# Altium PCB HS0038_BOARD.PcbDoc
Units mm, origin at the board's own origin, x right, y up, seen from the top; angles counter-clockwise.
Board outline 85 x 85 mm, 2 copper layers (Top Layer, Bottom Layer); 70 components, 51 nets, 283 pads, 29 vias.
Unrouted connection lines stored in the file: 40.
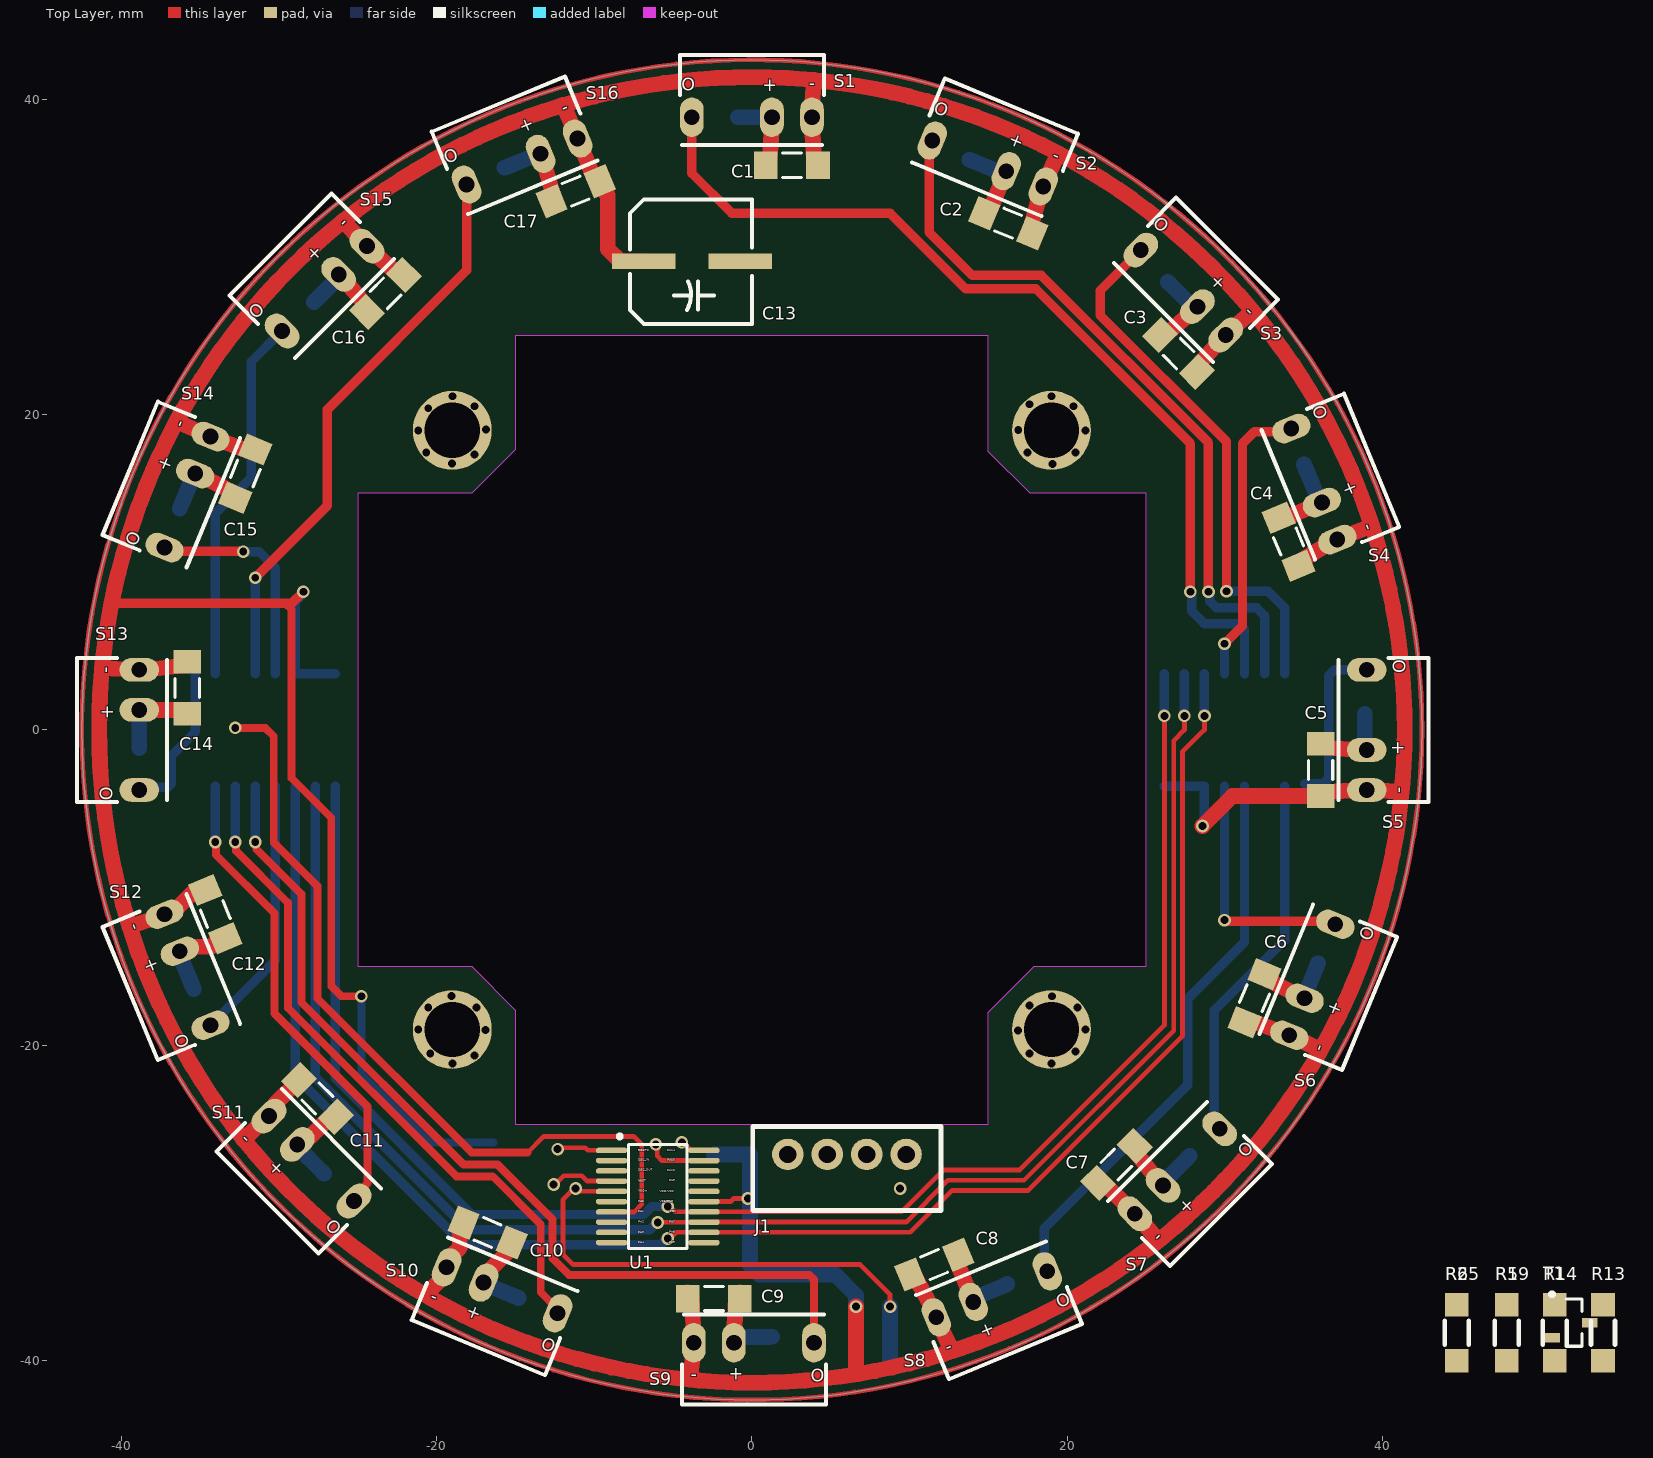
[diagram p0: Top Layer view]
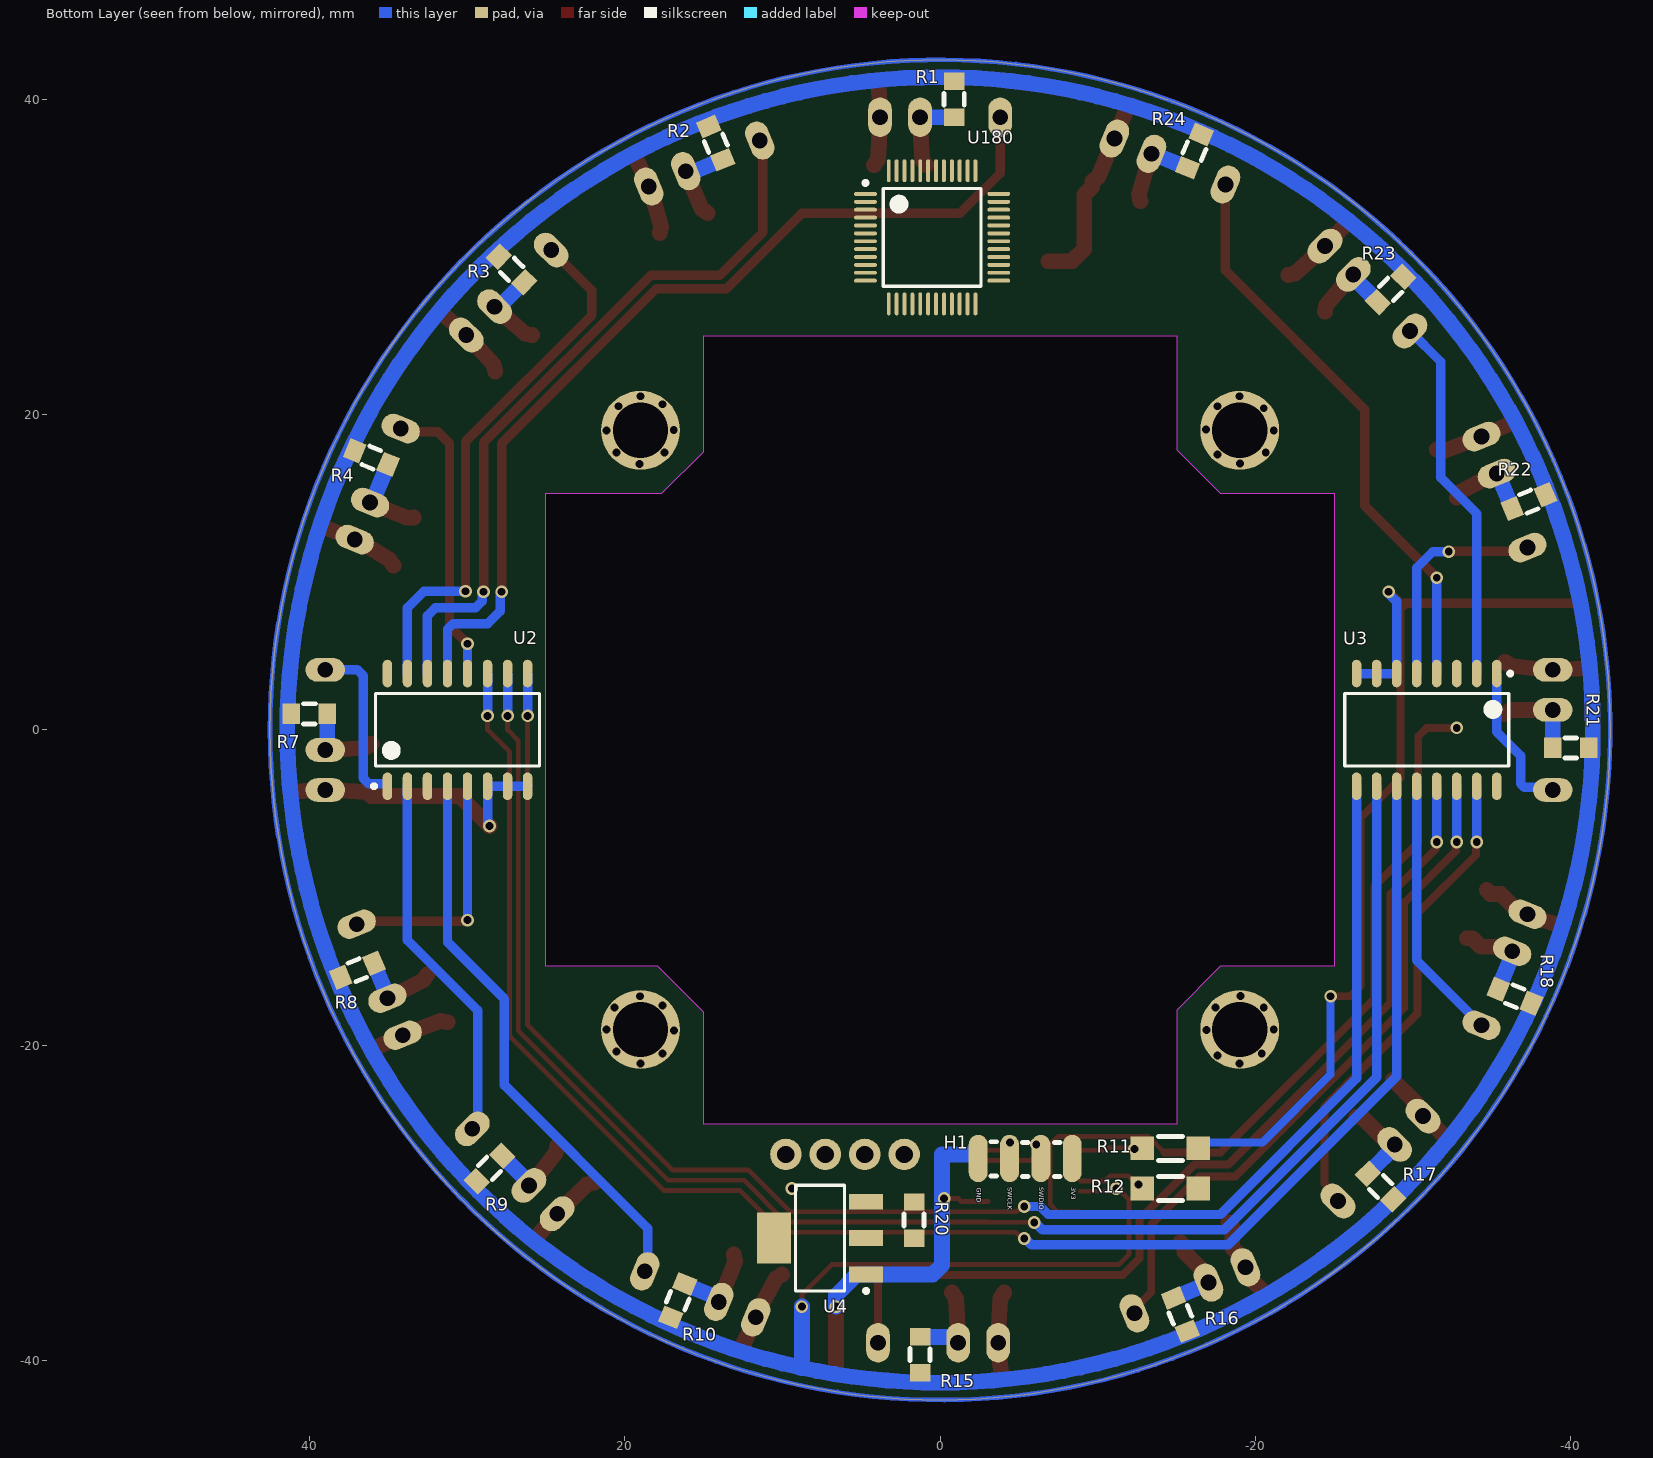
[diagram p1: Bottom Layer view, seen from below]
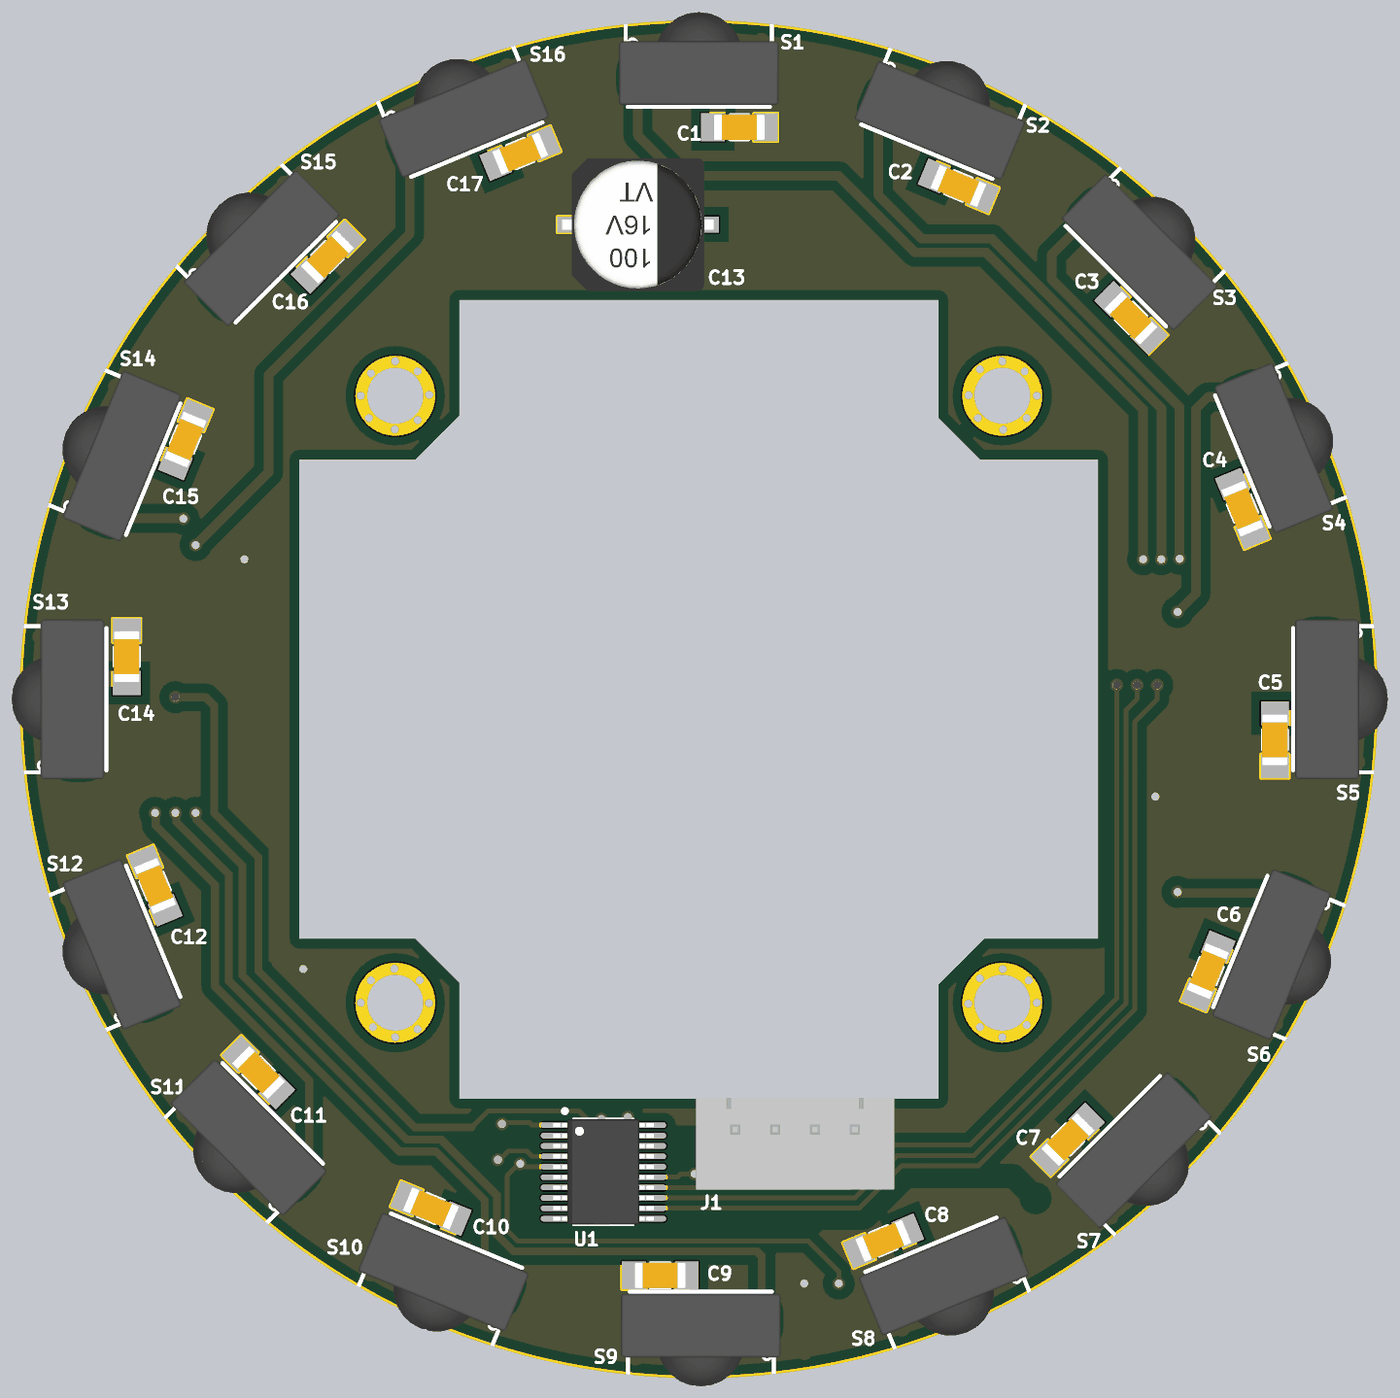
[diagram p2: 3D render of the assembled board from above, using the file's embedded part models]
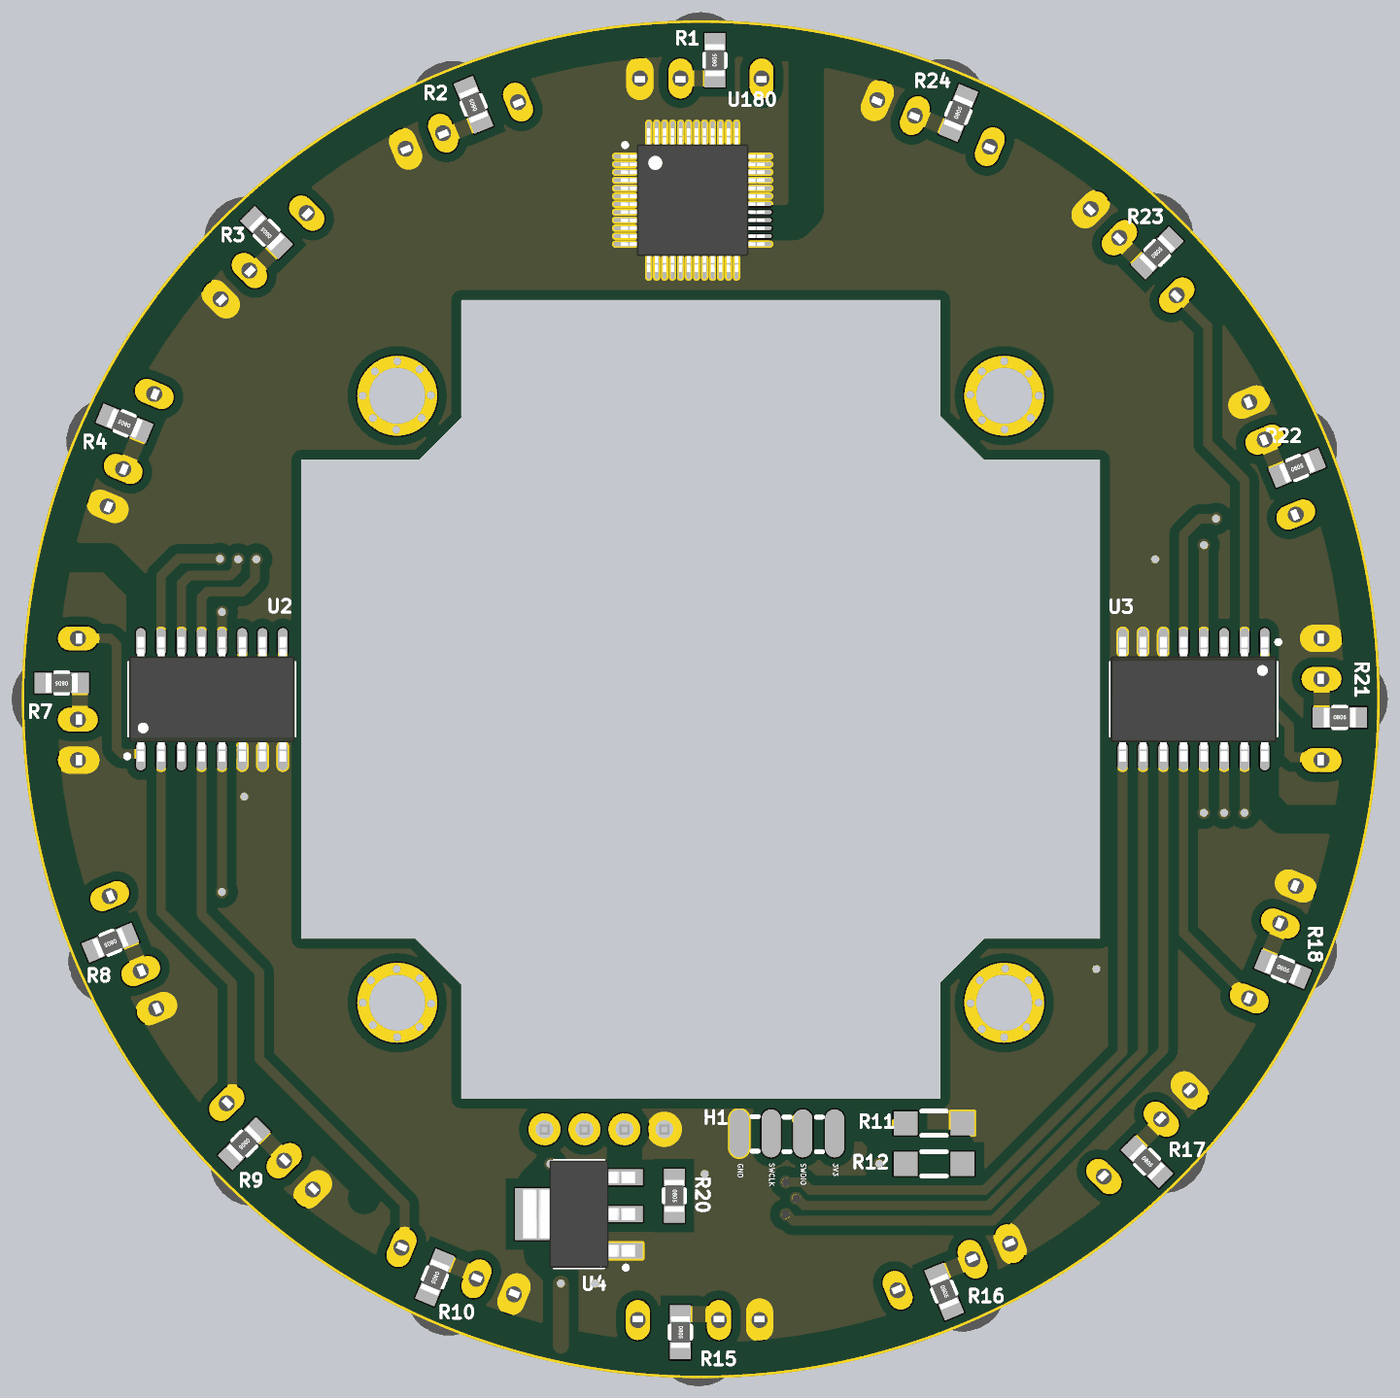
[diagram p3: 3D render of the assembled board from below, using the file's embedded part models]

## Layer stack, top to bottom
Top Solder: solder mask 0.0102, Solder Resist, Dk 3.5
Top Layer: signal copper 0.0356
Dielectric 1: dielectric 0.32, FR-4, Dk 4.8
Bottom Layer: signal copper 0.0356
Bottom Solder: solder mask 0.0102, Solder Resist, Dk 3.5

## Board outline
-42.5,0 ccw(c0,0) 0,-42.5 ccw(c0,0) 42.5,0 ccw(c0,0) 0,42.5 ccw(c0,0)
cut-out: -17.766,-15 -15,-17.766 -15,-25 15,-25 15,-17.893 17.893,-15 25,-15 25,15 17.639,15 15,17.639 15,25 -15,25 -15,17.766 -17.766,15 -25,15 -25,-15

## Design rules (kind name [scope] priority, off if disabled: settings)
Clearance [All] p1: gap=0.254 ignorepadtopadclearanceinfootprint=FALSE except(0: Arc-Hole Track-Hole SMDPad-Hole THPad-Hole Via-Hole Fill-Hole Poly-Hole Region-Hole Text-Hole; 0.6: Arc-Fill Arc-Poly Arc-Region Track-Fill Track-Poly Track-Region SMDPad-Fill SMDPad-Poly SMDPad-Region THPad-Fill THPad-Poly THPad-Region Via-Fill Via-Poly Via-Region Fill-Fill Fill-Poly Fill-Region Poly-Poly Poly-Region Region-Region)
PlaneConnect [All] p1: planeconnectstyle=Direct reliefexpansion=0.508 reliefentries=4 reliefconductorwidth=0.254 reliefairgap=0.254
PolygonConnect [All] p1: connectstyle=Direct reliefconductorwidth=0.254 reliefentries=4 polygonreliefangle="90 Angle" airgapwidth=0.254
RoutingVias [All] p1: holewidth=0.5 width=0.8 viastyle="Through Hole" minholewidth=0.5 minwidth=0.8 maxholewidth=0.6 maxwidth=1
SolderMaskExpansion [All] p1: expansion=0.102 istentingtop=FALSE
Width [All] p1: maxlimit=10 minlimit=0.254 preferedwidth=0.3
29 further rules are at their usual default settings.

## Classes and differential pairs
component class HS0038_BOARD: C1 C2 C3 C4 C5 C6 C7 C8 C9 C10 C11 C12 C13 C14 C15 C16 C17 H1 J1 R1 R2 R3 R4 R8 R9 R10 R11 R12 R13 R15 R16 R17 R18 R19 R22 R24 R25 S1 S2 S3 S4 S5 S6 S7 S8 S9 S10 S11 S12 S13 S14 S15 S16 T1 U1 U2 U3 U4

## Components (designator, comment, footprint, x,y, rotation, side; value= is the part's Value field where it differs from the comment)
C1 "CAP" CAP1206 2.54,35.814 r0 top
C2 "CAP" CAP1206 16.257,32.134 r337.5 top
C3 "CAP" CAP1206 27.051,23.876 r315 top
C4 "CAP" CAP1206 34.036,11.938 r292.5 top
C5 "CAP" CAP1206 36.068,-2.54 r270 top
C6 "CAP" CAP1206 31.877,-17.018 r247.5 top
C7 "CAP" CAP1206 23.114,-27.559 r225 top
C8 "CAP" CAP1206 11.557,-33.909 r202.5 top
C9 "CAP" CAP1206 -2.413,-36.068 r180 top
C10 "CAP" CAP1206 -16.764,-31.877 r157.5 top
C11 "CAP" CAP1206 -27.559,-23.368 r135 top
C12 "CAP" CAP1206 -34.033,-11.683 r112.5 top
C13 "CAP" "CAP SMD 100uF 16V" -3.81,29.718 r0 top
C14 "CAP" CAP1206 -35.814,2.667 r90 top
C15 "CAP" CAP1206 -32.131,16.256 r67.5 top
C16 "CAP" CAP1206 -23.241,27.686 r45 top
C17 "CAP" CAP1206 -11.177,34.166 r22.5 top
H1 "PROG" PROGRAMER -5.334,-27.178 r0 bottom
J1 "XH4" "XH 4PIN" 6.026,-27.813 r180 top locked
R1 "RES" RES805 -0.889,40.005 r90 bottom
R2 "RES" RES805 14.224,37.211 r67.5 bottom
R3 "RES" RES805 27.178,29.21 r45 bottom
R4 "RES" RES805 36.068,17.272 r22.5 bottom
R5 "RES" RES1206 47.879,-38.227 r90 top
R6 "RES" RES1206 44.704,-38.227 r90 top
R7 "RES" RES805 40.005,1.016 r0 bottom
R8 "RES" RES805 36.957,-15.24 r337.5 bottom
R9 "RES" RES805 28.575,-27.813 r315 bottom
R10 "RES" RES805 16.637,-36.195 r292.5 bottom
R11 "RES" RES1206 -14.605,-26.543 r0 bottom
R12 "RES" RES1206 -14.605,-29.083 r0 bottom
R13 "RES" RES1206 53.975,-38.227 r90 top
R14 "RES" RES1206 50.927,-38.227 r90 top
R15 "RES" RES805 1.27,-39.624 r270 bottom
R16 "RES" RES805 -15.24,-37.084 r247.5 bottom
R17 "RES" RES805 -27.94,-28.956 r225 bottom
R18 "RES" RES805 -36.449,-16.891 r202.5 bottom
R19 "RES" RES1206 47.879,-38.227 r90 top
R20 "RES" RES805 1.651,-31.088 r270 bottom
R21 "RES" RES805 -40.005,-1.143 r180 bottom
R22 "RES" RES805 -37.338,14.478 r157.5 bottom
R23 "RES" RES805 -28.575,27.94 r135 bottom
R24 "RES" RES805 -16.129,36.703 r112.5 bottom
R25 "RES" RES1206 44.704,-38.227 r90 top
S1 "TSOP1738" TSOP1738 0,38.608 r180 top
S2 "TSOP1738" TSOP1738 14.859,35.687 r157.5 top
S3 "TSOP1738" TSOP1738 27.178,27.559 r135 top
S4 "TSOP1738" TSOP1738 35.433,15.494 r112.5 top
S5 "TSOP1738" TSOP1738 38.735,0 r90 top
S6 "TSOP1738" TSOP1738 35.306,-15.748 r67.5 top
S7 "TSOP1738" TSOP1738 26.797,-27.813 r45 top
S8 "TSOP1738" TSOP1738 15.113,-35.56 r22.5 top
S9 "TSOP1738" TSOP1738 0.127,-38.608 r0 top
S10 "TSOP1738" TSOP1738 -15.748,-35.306 r337.5 top
S11 "TSOP1738" TSOP1738 -27.751,-27.007 r315 top
S12 "TSOP1738" TSOP1738 -35.56,-15.113 r292.5 top
S13 "TSOP1738" TSOP1738 -38.608,0 r270 top
S14 "TSOP1738" TSOP1738 -35.56,14.986 r247.5 top
S15 "TSOP1738" TSOP1738 -26.924,27.813 r225 top
S16 "TSOP1738" TSOP1738 -14.478,35.814 r202.5 top
T1 "AO3400A" AO3400A 51.943,-37.592 r0 top
U1 "STM32F030F4P6" STM32F030F4P6 -5.969,-29.591 r0 top locked
U2 "MUX8" "4051 SMD" 30.607,0 r90 bottom
U3 "MUX8" "4051 SMD" -30.861,0 r270 bottom
U4 "1117" AMS1117 7.62,-32.231 r0 bottom
U180 "Comment" STM32F103C8T6 0.508,31.242 r180 bottom
? "Comment" SCREW -19,-19 r90 top
? "Comment" SCREW 19,-19 r180 top
? "Comment" SCREW 19,19 r270 top
? "Comment" SCREW -19,19 r0 top

## Footprints (in the part's own frame and the unit in brackets; to place one, negate y for a bottom-side part, rotate by r counter-clockwise, add the part's x,y. Pads: shape width x height; smd on the part's side, far side on the other; paste and mask are expansions set on the pad)
"4051 SMD" [mm] "SOP, 16-Leads, Body 10.20x5.30mm, Pitch 1.27mm, IPC Medium Density"
  oval 1.75x0.6 smd: 1(-3.575,4.445) 2(-3.575,3.175) 3(-3.575,1.905) 4(-3.575,0.635) 5(-3.575,-0.635) 6(-3.575,-1.905) 7(-3.575,-3.175) 8(-3.575,-4.445) 9(3.575,-4.445) 10(3.575,-3.175) 11(3.575,-1.905) 12(3.575,-0.635) 13(3.575,0.635) 14(3.575,1.905) 15(3.575,3.175) 16(3.575,4.445)
  silkscreen extent -3.7,-5.2 2.3,5.42, body extent -3.9,-5.2 3.9,5.2, height 2
AMS1117 [mm] "SOT223, 4-Leads, Body 6.30x7.00mm (avg), Pitch 2.30mm, IPC Medium Density"
  rect 2.15x1 smd: 1(-2.925,2.3) 2(-2.925,0) 3(-2.925,-2.3)
  rect 2.15x3.25 smd: 4(2.925,0)
  silkscreen extent -3.05,-3.35 1.55,3.47, body extent -3.5,-3.35 3.5,3.35, height 1.65
AO3400A [mm] "SOT23, 3-Leads, Body 2.90x2.45mm, Pitch 0.95mm, IPC Medium Density"
  rect 1x0.6 smd: 1(-1.2,0.95) 2(-1.2,-0.95) 3(1.2,0)
  silkscreen extent -1.32,-1.5 0.7,1.92, body extent -1.3,-1.5 1.3,1.5, height 1.1
CAP1206 [mm] "Chip Capacitor, 2-Leads, Body 3.20x1.60mm, IPC Medium Density"
  rect 1.5x1.75 smd: 1(-1.651,0) 2(1.651,0)
  silkscreen extent -0.6,-0.77 0.6,0.77, body extent -1.6,-0.8 1.6,0.8, height 1
"CAP SMD 100uF 16V" [mm]
  rect 4x1 smd: 1(-3.048,0) 2(3.07,0.003)
  silkscreen extent -3.94,-3.97 3.81,3.94, body extent -4.75,-4.15 4.75,4.15, height 10.51
PROGRAMER [mm]
  oval 1.2x3 smd: 1(-3.048,0) 2(-1.058,0) 3(0.931,0) 4(2.921,0)
  silkscreen extent -2.29,-1.05 2.12,1.14
RES805 [mm]
  rect 1.1x1.3 smd: 1(-1.143,0) 2(1.143,0)
  silkscreen extent -0.39,-0.64 0.38,0.64, body extent -1,-0.6 1,0.6, height 0.48
RES1206 [mm]
  rect 1.5x1.5 smd: 1(-1.778,0) 2(1.778,0)
  silkscreen extent -0.76,-0.76 0.76,0.76, body extent -1.58,-0.82 1.58,0.82, height 0.53
SCREW [mm]
  round 5 hole 3.5: 1(0,0)
  round 0 hole 0.5: ""(-2.159,0) ""(-1.651,-1.397) ""(-1.524,1.397) ""(-0.031,-2.11) ""(0,2.159) ""(1.397,1.524) ""(1.397,-1.524) ""(2.128,0.059)
STM32F030F4P6 [mm] "TSOP, 20-Leads, Body 6.50x4.40mm, Pitch 0.65mm, IPC Medium Density"
  oval 2x0.35 smd: 1(-2.925,2.925) 2(-2.925,2.275) 3(-2.925,1.625) 4(-2.925,0.975) 5(-2.925,0.325) 6(-2.925,-0.325) 7(-2.925,-0.975) 8(-2.925,-1.625) 9(-2.925,-2.275) 10(-2.925,-2.925) 11(2.925,-2.925) 12(2.925,-2.275) 13(2.925,-1.625) 14(2.925,-0.975) 15(2.925,-0.325) 16(2.925,0.325) 17(2.925,0.975) 18(2.925,1.625) 19(2.925,2.275) 20(2.925,2.925)
  silkscreen extent -2.54,-3.3 1.85,3.93, body extent -3.15,-3.3 3.15,3.3, height 1.2
STM32F103C8T6 [mm] "TSQFP, 48-Leads, Body 7.00x7.00mm, Pitch 0.50mm, IPC Medium Density"
  oval 1.45x0.254 smd: 1(-4.225,2.75)
  oval 1.45x0.25 smd: 2(-4.225,2.25) 3(-4.225,1.75) 4(-4.225,1.25) 5(-4.225,0.75) 6(-4.225,0.25) 7(-4.225,-0.25) 8(-4.225,-0.75) 9(-4.225,-1.25) 10(-4.225,-1.75) 11(-4.225,-2.25) 12(-4.225,-2.75) 25(4.225,-2.75) 26(4.225,-2.25) 27(4.225,-1.75) 28(4.225,-1.25) 29(4.225,-0.75) 30(4.225,-0.25) 31(4.225,0.25) 32(4.225,0.75) 33(4.225,1.25) 34(4.225,1.75) 35(4.225,2.25) 36(4.225,2.752)
  oval 0.25x1.45 smd: 13(-2.75,-4.225) 14(-2.25,-4.225) 15(-1.75,-4.225) 16(-1.25,-4.225) 17(-0.75,-4.225) 18(-0.25,-4.225) 19(0.25,-4.225) 20(0.75,-4.225) 21(1.25,-4.225) 22(1.75,-4.225) 23(2.25,-4.225) 24(2.75,-4.225) 37(2.75,4.225) 38(2.25,4.225) 39(1.75,4.225) 40(1.25,4.225) 41(0.75,4.225) 42(0.25,4.225) 43(-0.25,4.225) 44(-0.75,4.225) 45(-1.25,4.225) 46(-1.75,4.225) 47(-2.25,4.225) 48(-2.75,4.225)
  silkscreen extent -4.35,-3.1 3.1,3.57, body extent -4.5,-4.5 4.5,4.5, height 1.6
TSOP1738 [mm]
  oval 1.5x2.5 hole 1: 1(-3.81,-0.254) 2(-1.27,-0.254) 3(3.81,-0.254)
  silkscreen extent -4.57,-4.19 4.57,1.52, body extent -5,-4.4 5,1.4, height 13.5
"XH 4PIN" [mm]
  round 2 hole 1.1: 1(-3.753,-0.889) 2(-1.253,-0.889) 3(1.247,-0.889) 4(3.747,-0.889)
  silkscreen extent -5.97,-2.67 5.97,2.67, body extent -6.2,-2.88 6.2,2.88, height 7

## Part data
C1 C2 C3 C4 C5 C6 C7 C8 C9 C10 C11 C12 C14 C15 C16 C17: library part CAP1206, "Capacitor SMD 1206"
C13: library part "CAP Electrolit SMD", "Capacitor Electrolit SMD"
H1: library part Programmer
J1: library part "XH 4PIN", "XH Connector 4pins"
R1 R2 R3 R4 R7 R8 R9 R10 R15 R16 R17 R18 R20 R21 R22 R23 R24: library part RES805, "RESISTOR SMD"
R5 R6 R11 R12 R13 R14 R19 R25: library part RES1206, "RESISTOR SMD"
S1 S2 S3 S4 S5 S6 S7 S8 S9 S10 S11 S12 S13 S14 S15 S16: "IR SENSOR"
U2 U3: library part 4051, "MULTIPLEXER 8 BIT"
U4: library part AMS1117, "3.3v Regulator"

## Via types
v1: diameter 0.8, hole 0.5, Top Layer to Bottom Layer, tented both sides, 29 vias

## Nets (pads, with @x,y where several pads share a name; then routed paths per layer and width w, separated by ;. In a path a pad name is that pad's centre, name@x,y a point inside that pad or via, vN(x,y) a via of type N, cw(c..) or ccw(c..) an arc to the next point about the centre after c; other vN are vias at no path point)
+5: J1.4 R1.2 R2.2 R3.2 R4.2 R7.2 R8.2 R9.2 R10.2 R15.2 R16.2 R17.2 R18.2 R20.1 R21.2 R22.2 R23.2 R24.2 U4.3 | length 293.5
  Top Layer w0.3: -8.894,-29.266 -10.858,-29.266 -11.041,-29.083 -11.257,-29.083 -11.984,-29.81 -11.984,-33.249 -11.324,-33.909 6.858,-33.909 8.763,-35.814 v1(8.763,-36.576)
  Bottom Layer w1: 8.752,-40.464 v1@8.752,-36.576 ; 41.4,0 ccw(c0,0) 41.4,0
  other v1: -11.176,-29.083 9.398,-29.083
A: U1.14 U2.9 U3.9 | length 102.2
  Top Layer w0.3: v1(-5.334,-30.226) -5.199,-30.226 -4.859,-30.566 U1.14 9.506,-30.566 12.162,-27.91 16.988,-27.91 26.162,-18.736 v1(26.162,0.889)
  Bottom Layer w0.6: U3.9 -26.416,-22.098 -17.78,-30.734 -6.858,-30.734 -6.35,-30.226 v1(-5.334,-30.226) ; v1(26.162,0.889) U2.9
ADC0: R13.1 R14.2 U1.6
ADC1: R19.1 R25.2 U1.7 | length 51.6
  Top Layer w0.3: -14.232,-26.805 -13.208,-25.781 -7.493,-25.781 -6.985,-26.289 -6.985,-30.099 -7.462,-30.576 -8.884,-30.576 U1.7
  Top Layer w0.5: v1(-32.766,0.127) -30.861,0.127 -30.328,-0.406 -30.328,-7.137 -27.559,-9.906 -27.559,-17.018 -17.772,-26.805 -14.232,-26.805
B: U1.13 U2.10 U3.10 | length 105
  Top Layer w0.3: v1(-5.969,-31.242) -5.953,-31.226 -3.054,-31.226 U1.13 9.775,-31.216 12.431,-28.56 17.257,-28.56 26.751,-19.066 26.751,-0.681 27.432,0 v1(27.432,0.889)
  Bottom Layer w0.6: U3.10 -27.686,-22.036 -18.034,-31.688 -6.469,-31.688 -6.023,-31.242 v1(-5.969,-31.242) ; v1(27.432,0.889) U2.10
BOOT0: R11.2 U1.1 | length 3.5
  Top Layer w0.3: v1(-12.319,-26.585) -12.235,-26.501 -10.581,-26.501 -10.416,-26.666 U1.1
C: U1.12 U2.11 U3.11 | length 108.1
  Top Layer w0.3: v1(-5.334,-32.258) -5.199,-32.258 -4.807,-31.866 U1.12 10.044,-31.866 12.7,-29.21 17.526,-29.21 27.305,-19.431 27.305,-1.397 28.702,0 v1(28.702,0.889)
  Bottom Layer w0.6: U3.11 -28.956,-21.973 -18.287,-32.642 -5.772,-32.642 -5.388,-32.258 v1(-5.334,-32.258) ; v1(28.702,0.889) U2.11
GND: C13.1 H1.4 J1.3 R6.2 R11.1 R14.1 R25.1 T1.2 U1.15 U2.6 U2.7 U2.8 U3.6 U3.7 U3.8 U4.1
NetC1_1: C1.1 R1.1 S1.2 | length 5.3
  Top Layer w1: C1.1 1.139,36.189 1.27,38.362 S1.2
  Bottom Layer w1: R1.1 S1.2
NetC2_1: C2.1 R2.1 S2.2 | length 5.7
  Top Layer w1: C2.1 15.106,33.017 15.938,34.974 S2.2
  Bottom Layer w1: R2.1 13.931,36.111 16.046,35.234 S2.2
NetC3_1: C3.1 R3.1 S3.2 | length 5.7
  Top Layer w1: C3.1 26.326,25.132 27.902,26.487 S3.2
  Bottom Layer w1: R3.1 26.486,28.306 28.103,26.688 S3.2
NetC4_1: C4.1 R4.1 S4.2 | length 5.7
  Top Layer w1: C4.1 33.816,13.449 35.692,14.227 S4.2
  Bottom Layer w1: R4.1 35.076,16.699 36.04,14.371 S4.2
NetC5_1: C5.1 R7.1 S5.2 | length 5.4
  Top Layer w1: C5.1 36.443,-1.139 38.489,-1.27 S5.2
  Bottom Layer w1: R7.1 38.87,0.866 38.87,-1.27 S5.2
NetC6_1: C6.1 R8.1 S6.2 | length 5.5
  Top Layer w1: C6.1 32.76,-15.867 34.593,-16.827 S6.2
  Bottom Layer w1: S6.2 34.997,-16.995 35.847,-14.943 R8.1
NetC7_1: C7.1 R9.1 S7.2 | length 5.8
  Top Layer w1: C7.1 24.37,-26.834 25.725,-28.537 S7.2
  Bottom Layer w1: S7.2 25.986,-28.798 27.667,-27.117 R9.1
NetC8_1: C8.1 R10.1 S8.2 | length 5.9
  Top Layer w1: C8.1 12.995,-33.719 13.846,-35.819 S8.2
  Bottom Layer w1: S8.2 13.955,-36.084 16.066,-35.209 R10.1
NetC9_1: C9.1 R15.1 S9.2 | length 6
  Top Layer w1: S9.2 -1.143,-38.362 -1.012,-36.062 C9.1@-0.762,-35.687
  Bottom Layer w1: S9.2 -1.143,-38.505 1.12,-38.505 R15.1
NetC10_1: C10.1 R16.1 S10.2 | length 5.8
  Top Layer w1: S10.2 -17.019,-34.649 -15.485,-33.116 -15.485,-32.755 C10.1
  Bottom Layer w1: S10.2 -17.037,-35.099 -14.94,-35.968 R16.1
NetC11_1: C11.1 R17.1 S11.2 | length 5.8
  Top Layer w1: S11.2 -28.38,-25.84 -28.049,-25.84 -26.745,-24.535 C11.1
  Bottom Layer w1: S11.2 -28.905,-26.365 -27.233,-28.037 R17.1
NetC12_1: C12.1 R18.1 S12.2 | length 5.9
  Top Layer w1: S12.2 -35.994,-13.75 -34.292,-13.75 -33.75,-13.208 C12.1
  Bottom Layer w1: S12.2 -36.372,-14.075 -35.445,-16.313 R18.1
NetC14_1: C14.1 R21.1 S13.2 | length 5.5
  Top Layer w1: S13.2 -38.362,1.27 -36.189,1.266 C14.1
  Bottom Layer w1: R21.1 S13.2
NetC15_1: C15.1 R22.1 S14.2 | length 5.5
  Top Layer w1: S14.2 -34.847,16.065 -33.014,15.105 C15.1
  Bottom Layer w1: R22.1 -36.222,14.178 -35.353,16.275 S14.2
NetC16_1: C16.1 R23.1 S15.2 | length 5.5
  Top Layer w1: S15.2 -25.852,28.537 -24.497,26.961 C16.1
  Bottom Layer w1: R23.1 -27.667,27.244 -26.113,28.798 S15.2
NetC17_1: C17.1 R24.1 S16.2 | length 5.6
  Top Layer w1: S16.2 -13.211,36.073 -12.615,33.977 C17.1
  Bottom Layer w1: R24.1 -15.552,35.701 -13.422,36.583 S16.2
NetR5_1: R5.1 R6.1 T1.1
NetR13_2: R13.2 U2.3
NetR19_2: R19.2 U3.3
NRST: R12.2 U1.4 | length 4
  Top Layer w0.3: v1(-12.573,-28.829) -12.471,-28.829 -11.921,-28.279 -10.794,-28.279 -10.457,-28.616 U1.4
S0: S1.3 U2.13 | length 59.6
  Top Layer w0.6: S1.3 -3.81,35.306 -1.27,32.766 8.763,32.766 13.554,27.975 17.999,27.975 27.813,18.161 v1(27.813,8.763)
  Bottom Layer w0.6: v1(27.813,8.763) 27.901,8.675 27.901,7.532 28.702,6.731 30.891,6.731 31.242,6.38 U2.13
S1: S2.3 U2.14 | length 46.7
  Top Layer w0.6: S2.3 11.245,37.188 11.245,31.554 13.97,28.829 18.353,28.829 28.956,18.226 v1(28.956,8.763)
  Bottom Layer w0.6: v1(28.956,8.763) 28.994,8.725 28.994,8.583 29.052,8.526 29.052,8.159 29.464,7.747 32.004,7.747 32.512,7.239 U2.14
S2: S3.3 U2.15 | length 34.3
  Top Layer w0.6: S3.3 22.098,27.867 22.098,26.291 30.099,18.29 v1(30.099,8.797)
  Bottom Layer w0.6: v1(30.099,8.797) 32.732,8.797 33.782,7.747 U2.15
S3: S4.3 U2.12 | length 18.5
  Top Layer w0.6: v1(29.972,5.461) 31.115,6.604 31.115,18.161 31.874,18.92 34.018,18.92 S4.3
  Bottom Layer w0.6: U2.12 v1(29.972,5.461)
S4: S5.3 U2.1 | length 10.7
  Bottom Layer w0.6: U2.1@35.052,-3.429 36.225,-3.429 36.576,-3.078 36.576,3.429 36.957,3.81 S5.3
S5: S6.3 U2.5 | length 15.6
  Top Layer w0.6: v1(29.972,-12.065) 30.026,-12.065 30.095,-12.134 36.807,-12.134 S6.3
  Bottom Layer w0.6: v1(29.972,-12.065) U2.5
S6: S7.3 U2.2 | length 23.7
  Bottom Layer w0.6: S7.3 29.337,-24.965 29.337,-17.782 33.782,-13.337 U2.2
S7: S8.3 U2.4 | length 36.1
  Bottom Layer w0.6: S8.3 18.539,-34.145 18.539,-31.618 27.629,-22.528 27.629,-17.075 31.242,-13.462 U2.4
S8: S9.3 U3.13 | length 60.2
  Top Layer w0.5: v1(-31.496,-7.112) -31.439,-7.169 -31.439,-7.55 -28.575,-10.414 -28.575,-17.272 -18.288,-27.559 -16.129,-27.559 -12.638,-31.05 -12.638,-32.574 -12.638,-33.52 -11.595,-34.563 -10.649,-34.563 3.644,-34.563 3.937,-34.856 S9.3
  Bottom Layer w0.6: v1(-31.496,-7.112) U3.13
S9: S10.3 U3.14 | length 43.2
  Top Layer w0.5: v1(-32.766,-7.112) -32.709,-7.169 -32.709,-7.677 -29.429,-10.957 -29.429,-17.626 -18.742,-28.313 -16.441,-28.313 -13.392,-31.362 -13.392,-35.661 -12.325,-36.728 S10.3
  Bottom Layer w0.6: v1(-32.766,-7.112) U3.14
S10: S11.3 U3.15 | length 30.7
  Top Layer w0.5: v1(-34.036,-7.112) -33.998,-7.15 -33.998,-7.915 -30.283,-11.629 -30.283,-17.979 -24.384,-23.878 -24.384,-28.758 -25.237,-29.611 S11.3
  Bottom Layer w0.6: v1(-34.036,-7.112) U3.15
S11: S12.3 U3.12 | length 16.9
  Bottom Layer w0.6: S12.3 -34.31,-18.73 -33.702,-18.123 -33.702,-18.096 -30.226,-14.62 U3.12
S12: S13.3 U3.1 | length 9.8
  Bottom Layer w0.6: S13.3 -38.69,-3.638 -37.039,-3.638 -36.83,-3.429 -36.83,-1.651 -35.306,-0.127 U3.1
S13: S14.3 U3.5 | length 14.3
  Top Layer w0.6: S14.3 -37.027,11.337 -32.292,11.337 v1(-32.258,11.303)
  Bottom Layer w0.6: v1(-32.258,11.303) -31.242,11.303 -30.226,10.287 U3.5
S14: S15.3 U3.2 | length 23.5
  Bottom Layer w0.6: U3.2 -34.036,13.716 -31.75,16.002 -31.75,23.346 S15.3
S15: S16.3 U3.4 | length 36.5
  Top Layer w0.6: v1@-31.458,9.69 -26.924,14.224 -26.924,20.32 -18.095,29.149 -18.095,33.694 -18.076,33.713 -18.076,34.572 S16.3
  Bottom Layer w0.6: U3.4 v1(-31.496,9.652)
S_GND: C1.2 C2.2 C3.2 C4.2 C5.2 C6.2 C7.2 C8.2 C9.2 C10.2 C11.2 C12.2 C14.2 C15.2 C16.2 C17.2 S1.1 S2.1 S3.1 S4.1 S5.1 S6.1 S7.1 S8.1 S9.1 S10.1 S11.1 S12.1 S13.1 S14.1 S15.1 S16.1 T1.3 | length 455.4
  Top Layer w0.3: -3.044,-29.916 -1.347,-29.916 -1.149,-29.718 v1(-0.254,-29.718)
  Top Layer w0.5: -29.591,8.021 -29.19,7.62 -29.19,-3.058 -26.678,-5.57 -26.678,-16.248 -26.035,-16.891 v1(-24.765,-16.891)
  Top Layer w0.6: -40.616,8.021 -29.591,8.021 -29.19,8.021 v1(-28.448,8.763)
  Top Layer w1: -41.213,3.931 -39.362,3.81 S13.1 -38.362,3.81 -36.189,4.068 C14.2 ; -39.474,-12.479 -37.715,-11.882 S12.1 -36.847,-11.69 -35.561,-10.404 -34.911,-10.404 C12.2 ; -36.48,19.575 -34.799,18.795 S14.1 -33.875,18.412 -31.941,17.694 C15.2 ; -32.216,-26.001 -30.708,-24.493 S11.1 -30.176,-24.044 -30.176,-23.65 C11.2 ; -25.924,32.278 -24.763,31.04 S15.1 -24.056,30.333 -22.516,28.942 C16.2 ; -20.526,-35.953 -20.526,-35.65 -19.365,-34.489 S10.1 -19.365,-33.677 -18.536,-32.848 -18.536,-31.492 C10.2 ; -11.978,39.629 -11.247,37.969 S16.1 -10.864,37.045 -10.026,35.049 C17.2 -9.652,34.449 -9.144,33.941 -9.144,30.504 -8.358,29.718 -6.858,29.718 ; C9.2@-4.064,-35.687 -3.814,-36.062 -3.683,-38.362 S9.1 -3.683,-39.362 -3.943,-41.212 ; 3.919,41.214 3.81,39.362 S1.1 3.81,38.362 3.941,36.189 C1.2 ; v1(6.604,-36.576) 6.604,-40.851 6.62,-40.867 ; C8.2 10.406,-34.792 11.499,-36.791 S8.1 11.882,-37.715 12.71,-39.401 ; C2.2 17.695,31.945 18.285,34.002 S2.1 18.668,34.926 19.423,36.561 ; C7.2 22.389,-28.815 23.929,-30.333 S7.1 24.636,-31.04 25.769,-32.403 ; C3.2 28.307,23.151 29.698,24.691 S3.1 30.405,25.398 31.752,26.566 ; v1(28.575,-6.096) 30.48,-4.191 C5.2 36.443,-3.941 38.489,-3.81 S5.1 39.489,-3.81 41.213,-3.931 ; C6.2 31.687,-18.456 33.621,-19.174 S6.1 34.545,-19.557 36.07,-20.321 ; C4.2 34.919,10.787 36.664,11.88 S4.1 37.588,12.263 39.326,12.94 ; 41.4,0 ccw(c0,0) 41.4,0
  Bottom Layer w0.3: v1(-0.254,-29.718) -0.254,-29.591 v1@-0.127,-29.464
  Bottom Layer w0.5: v1(-24.765,-16.891) -24.765,-21.844 -20.447,-26.162 -16.383,-26.162
  Bottom Layer w0.6: v1(-28.448,8.763) -28.448,8.655 -28.956,8.147 -28.956,3.575 -27.686,3.575 -26.416,3.575 ; 26.162,-3.575 27.432,-3.575 28.607,-3.575 ; v1(28.575,-6.096) 28.575,-5.988 28.702,-5.861 28.702,-3.575
  Bottom Layer w1: -2.413,-26.924 -0.127,-26.924 -0.127,-29.464 -0.127,-33.945 0.459,-34.531 4.695,-34.531 5.27,-34.531 6.604,-35.865 v1(6.604,-36.576)
SCL: J1.2 U1.17
SDA: J1.1 U1.18
SENSOR_EN: R5.2 U1.10
SWCLK: H1.3 U1.20 | length 1.6
  Top Layer w0.3: v1(-4.445,-26.162) -4.387,-26.162 -3.883,-26.666 U1.20
SWIO: H1.2 U1.19 | length 3.8
  Top Layer w0.3: v1(-6.096,-26.289) -6,-26.385 -6,-27.02 -5.704,-27.316 U1.19
VCC: C13.2 H1.1 R12.1 R20.2 U1.5 U1.16 U2.16 U3.16 U4.2 U4.4
pads on no net: ?. ?.1 U1.2 U1.3 U1.8 U1.9 U1.11 U180.1 U180.2 U180.3 U180.4 U180.5 U180.6 U180.7 U180.8 U180.9 U180.10 U180.11 U180.12 U180.13 U180.14 U180.15 U180.16 U180.17 U180.18 U180.19 U180.20 U180.21 U180.22 U180.23 U180.24 U180.25 U180.26 U180.27 U180.28 U180.29 U180.30 U180.31 U180.32 U180.33 U180.34 U180.35 U180.36 U180.37 U180.38 U180.39 U180.40 U180.41 U180.42 U180.43 U180.44 U180.45 U180.46 U180.47 U180.48
copper on no net: | length 534.1
  Top Layer w0.3: 42.5,0 ccw(c0,0) 42.5,0
  Bottom Layer w0.3: 42.5,0 ccw(c0,0) 42.5,0

## Polygon pours and split planes (outlines as drawn)
S_GND on Top Layer "NONET_L01_P000" (solid, shelved, pour order 0): -42.5,0 ccw(c0,0) 0,-42.5 ccw(c0,0) 42.5,0 ccw(c0,0) 0,42.5 ccw(c0,0)
S_GND on Bottom Layer "NONET_L02_P001" (solid, shelved, pour order 1): -42.5,0 ccw(c0,0) 0,-42.5 ccw(c0,0) 42.5,0 ccw(c0,0) 0,42.5 ccw(c0,0)

## Silkscreen, mask and mechanical layers (free items; w line width, h text height)
Top Solder:
  circle w0.3: c0,0 r42.5
Bottom Solder:
  circle w0.3: c0,0 r42.5
Mechanical 1:
  circle w0.3: c0,0 r42.5
  lines w0.3: -25,-15 -17.766,-15 -15,-17.766 -15,-25 15,-25 15,-17.893 17.893,-15 25,-15 25,15 17.639,15 15,17.639 15,25 -15,25 -15,17.766 -17.766,15 -25,15 -25,-15

## Text inside footprints (layer, text, board x,y; h text height)
H1: Bottom Overlay "GND" at -2.337,-29.023 h0.3 r90; Bottom Overlay "SWCLK" at -4.304,-28.997 h0.3 r90; Bottom Overlay "SWDIO" at -6.273,-29.006 h0.3 r90; Bottom Overlay "3V3" at -8.305,-29.006 h0.3 r90
S1: Top Overlay "O" at -3.609,41.349 h0.8 r180; Top Overlay "-" at 4.011,41.241 h0.8 r180; Top Overlay "+" at 1.598,41.228 h0.8 r180
S2: Top Overlay "O" at 12.574,39.6 h0.8 r157.5; Top Overlay "-" at 19.572,36.585 h0.8 r157.5; Top Overlay "+" at 17.338,37.496 h0.8 r157.5
S3: Top Overlay "O" at 26.564,32.049 h0.8 r135; Top Overlay "-" at 31.876,26.585 h0.8 r135; Top Overlay "+" at 30.161,28.282 h0.8 r135
S4: Top Overlay "O" at 36.584,19.877 h0.8 r112.5; Top Overlay "-" at 39.4,12.796 h0.8 r112.5; Top Overlay "+" at 38.465,15.02 h0.8 r112.5
S5: Top Overlay "O" at 41.476,3.609 h0.8 r90; Top Overlay "-" at 41.368,-4.011 h0.8 r90; Top Overlay "+" at 41.355,-1.598 h0.8 r90
S6: Top Overlay "O" at 39.219,-13.463 h0.8 r67.5; Top Overlay "-" at 36.204,-20.461 h0.8 r67.5; Top Overlay "+" at 37.115,-18.227 h0.8 r67.5
S7: Top Overlay "O" at 31.287,-27.199 h0.8 r45; Top Overlay "-" at 25.823,-32.511 h0.8 r45; Top Overlay "+" at 27.52,-30.796 h0.8 r45
S8: Top Overlay "O" at 19.496,-36.711 h0.8 r22.5; Top Overlay "-" at 12.415,-39.527 h0.8 r22.5; Top Overlay "+" at 14.639,-38.592 h0.8 r22.5
S9: Top Overlay "O" at 3.736,-41.349 h0.8; Top Overlay "-" at -3.884,-41.241 h0.8; Top Overlay "+" at -1.471,-41.228 h0.8
S10: Top Overlay "O" at -13.463,-39.219 h0.8 r337.5; Top Overlay "-" at -20.461,-36.204 h0.8 r337.5; Top Overlay "+" at -18.227,-37.115 h0.8 r337.5
S11: Top Overlay "O" at -27.138,-31.498 h0.8 r315; Top Overlay "-" at -32.449,-26.033 h0.8 r315; Top Overlay "+" at -30.734,-27.73 h0.8 r315
S12: Top Overlay "O" at -36.711,-19.496 h0.8 r292.5; Top Overlay "-" at -39.527,-12.415 h0.8 r292.5; Top Overlay "+" at -38.592,-14.639 h0.8 r292.5
S13: Top Overlay "O" at -41.349,-3.609 h0.8 r270; Top Overlay "-" at -41.241,4.011 h0.8 r270; Top Overlay "+" at -41.228,1.598 h0.8 r270
S14: Top Overlay "O" at -39.473,12.701 h0.8 r247.5; Top Overlay "-" at -36.458,19.699 h0.8 r247.5; Top Overlay "+" at -37.369,17.465 h0.8 r247.5
S15: Top Overlay "O" at -31.414,27.199 h0.8 r225; Top Overlay "-" at -25.95,32.511 h0.8 r225; Top Overlay "+" at -27.647,30.796 h0.8 r225
S16: Top Overlay "O" at -18.861,36.965 h0.8 r202.5; Top Overlay "-" at -11.78,39.781 h0.8 r202.5; Top Overlay "+" at -14.004,38.846 h0.8 r202.5
U1: Top Overlay "VDD/VCC" at -5.829,-29.309 h0.15; Top Overlay "BOOT0" at -7.194,-26.738 h0.15; Top Overlay "OSC_IN" at -7.194,-27.313 h0.15; Top Overlay "OSC_OUT" at -7.194,-27.966 h0.15; Top Overlay "NRST" at -7.194,-28.645 h0.15; Top Overlay "VDDA" at -7.194,-29.298 h0.15; Top Overlay "PA0" at -7.194,-29.951 h0.15; Top Overlay "PA1" at -7.194,-30.604 h0.15; Top Overlay "PA2" at -7.194,-31.257 h0.15; Top Overlay "PA3" at -7.194,-31.91 h0.15; Top Overlay "PA4" at -7.194,-32.563 h0.15; Top Overlay "PA14" at -5.354,-26.73 h0.15; Top Overlay "PA13" at -5.354,-27.329 h0.15; Top Overlay "PA10" at -5.354,-27.983 h0.15; Top Overlay "PA9" at -5.229,-28.636 h0.15; Top Overlay "VSS/GND" at -5.829,-29.961 h0.15; Top Overlay "PB1" at -5.179,-30.596 h0.15; Top Overlay "PA7" at -5.229,-31.249 h0.15; Top Overlay "PA6" at -5.229,-31.902 h0.15; Top Overlay "PA5" at -5.229,-32.555 h0.15